# Altium PCB PCB1.PcbDoc
Units mil, origin at the board's own origin, x right, y up, seen from the top; angles counter-clockwise.
Board outline 2392.09 x 1644.16 mil, 2 copper layers (Top Layer, Bottom Layer); 52 components, 35 nets, 173 pads, 40 vias.
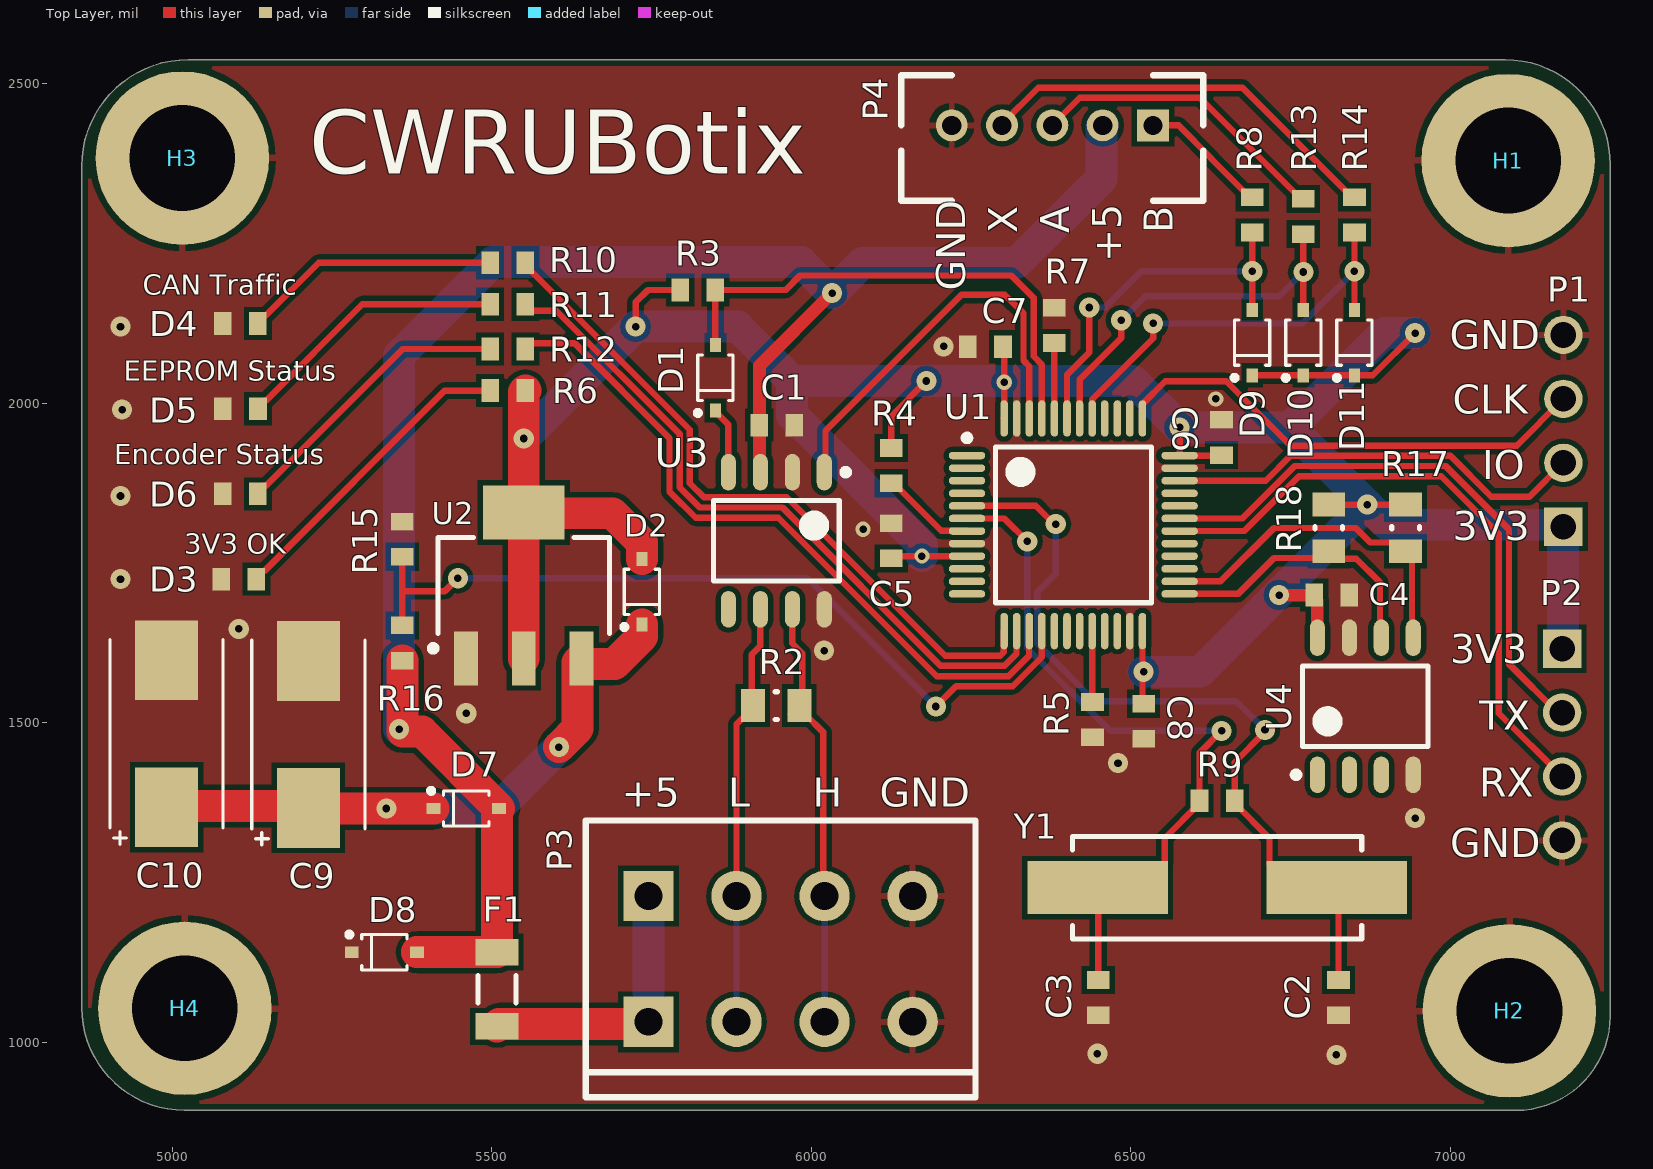
[diagram p0: Top Layer view]
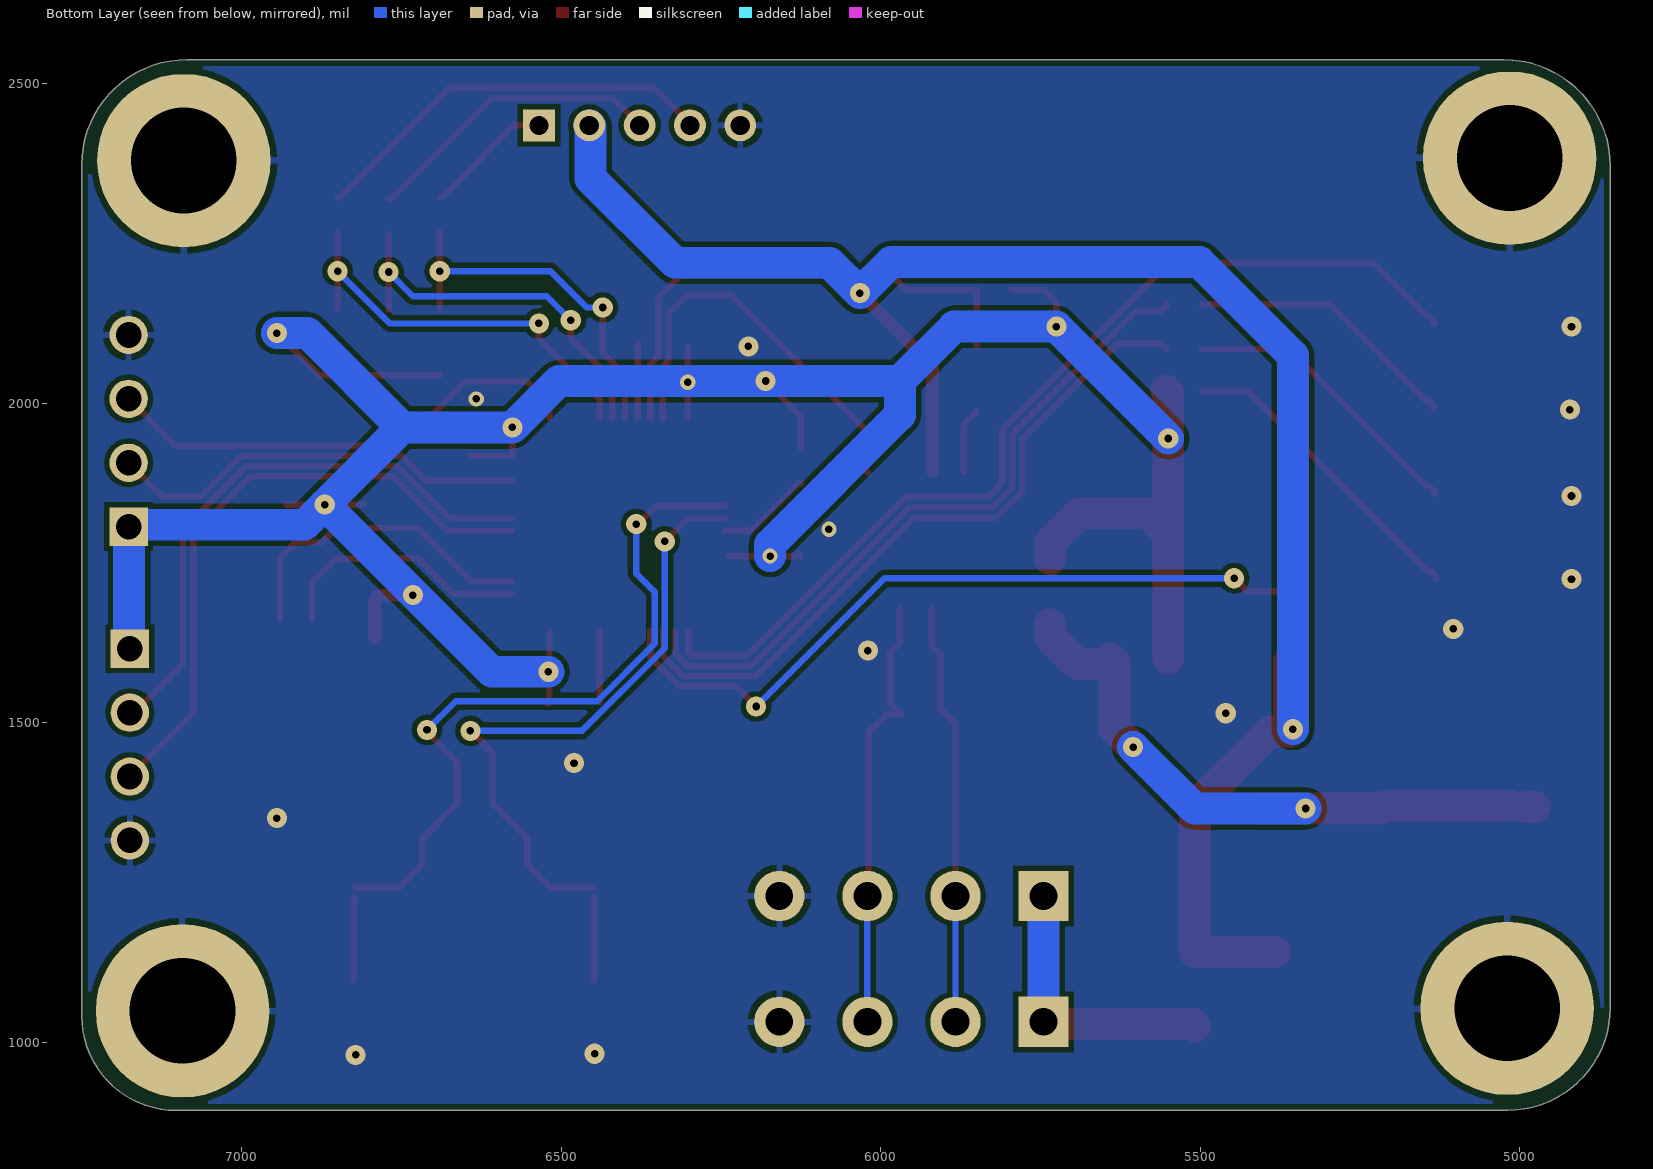
[diagram p1: Bottom Layer view, seen from below]

## Layer stack, top to bottom
Top Solder: solder mask 0.4, Solder Resist, Dk 3.5
Top Layer: signal copper 1.4
Dielectric 1: dielectric 12.6, FR-4, Dk 4.8
Bottom Layer: signal copper 1.4
Bottom Solder: solder mask 0.4, Solder Resist, Dk 3.5

## Board outline
4858.27,1054.49 ccw(c5019.06,1054.49) 5019.06,893.7 5019.06,893.6 7102.62,893.6 ccw(c7102.62,1041.34) 7250.36,1041.34 7250.36,2373.03 ccw(c7085.63,2373.03) 7085.63,2537.76 5025.04,2537.76 ccw(c5025.04,2370.99) 4858.27,2370.99

## Design rules (kind name [scope] priority, off if disabled: settings)
BoardOutlineClearance [All] p1: gap=10 ignorepadtopadclearanceinfootprint=FALSE except(0: Arc-SplitContinuation Track-SplitContinuation SMDPad-SplitContinuation THPad-SplitContinuation Via-SplitContinuation Fill-SplitContinuation Poly-SplitContinuation Region-SplitContinuation Text-SplitContinuation)
Clearance [All] p1: gap=7.87 ignorepadtopadclearanceinfootprint=FALSE except(0: Arc-Hole Track-Hole SMDPad-Hole THPad-Hole Via-Hole Fill-Hole Poly-Hole Region-Hole Text-Hole; 5.91: Arc-Arc Arc-Track Arc-SMDPad Arc-THPad Arc-Via Track-Track Track-SMDPad Track-THPad Track-Via SMDPad-SMDPad SMDPad-THPad SMDPad-Via THPad-THPad THPad-Via Via-Via; 10: Arc-Text Track-Text SMDPad-Text THPad-Text Via-Text Fill-Text Poly-Text Region-Text Text-Text)
PolygonConnect [All] p1: thpad.connectstyle=Relief thpad.reliefconductorwidth=10 thpad.reliefentries=4 thpad.polygonreliefangle="90 Angle" thpad.airgapwidth=10 smdpad.connectstyle=Direct smdpad.reliefconductorwidth=10 smdpad.reliefentries=4 smdpad.polygonreliefangle="90 Angle" smdpad.airgapwidth=10 via.connectstyle=Direct via.reliefconductorwidth=10 via.reliefentries=4 via.polygonreliefangle="90 Angle" via.airgapwidth=10
RoutingVias [All] p1: holewidth=28 width=50 viastyle="Through Hole" minholewidth=28 minwidth=50 maxholewidth=28 maxwidth=50
SolderMaskExpansion [All] p1: expansion=4
Width [All] p1: maxlimit=19685.04 minlimit=5.91 preferedwidth=10 minimp=50.000000 maximp=50.000000 favimp=50.000000
30 further rules are at their usual default settings.

## Components (designator, comment, footprint, x,y, rotation, side; value= is the part's Value field where it differs from the comment)
C1 "cap_single_np" chip_0603 5946,1966 r180 top
C2 "cap_single_np" chip_0603 6825,1070 r270 top
C3 "cap_single_np" chip_0603 6449,1070 r270 top
C4 "cap_single_np" chip_0603 6814.56,1700 r0 top
C5 "cap_single_np" chip_0603 6125,1785 r270 top
C6 "cap_single_np" chip_0603 6642,1946.56 r270 top
C7 "cap_single_np" chip_0603 6272.44,2088.44 r0 top
C8 "cap_single_np" chip_0603 6520,1502.44 r90 top
C9 "cap_single_p" chip_2917_AVX_TAJD 5213,1482 r90 top
C10 "cap_single_p" chip_2917_AVX_TAJD 4991,1483 r90 top
D1 "diode_2" sod323_0 5850,2040 r90 top
D2 "diode_2" sod323_0 5735,1705 r90 top
D3 "diode_4" chip_0603 5104,1725 r0 top
D4 "diode_4" chip_0603 5106.44,2125 r0 top
D5 "diode_4" chip_0603 5106.56,1991.67 r0 top
D6 "diode_4" chip_0603 5106.44,1858.33 r0 top
D7 "diode_2" sod323_0 5460,1366 r0 top
D8 "diode_5" sod323_0 5332,1141 r0 top
D9 "diode_2" sod323_0 6690,2095 r90 top
D10 "diode_2" sod323_0 6770,2095 r90 top
D11 "diode_2" sod323_0 6850,2095 r90 top
F1 "PTC_0" chip_1206 5508,1083 r90 top
H1 "mounting_hole_0" #8-32_SOCKET_HEAD 7090.55,2379.92 r0 top
H2 "mounting_hole_0" #8-32_SOCKET_HEAD 7092.52,1049.21 r0 top
H3 "mounting_hole_0" #8-32_SOCKET_HEAD 5015.75,2383.86 r0 top
H4 "mounting_hole_0" #8-32_SOCKET_HEAD 5019.69,1053.15 r0 top
P1 "conn-4x1_0" HDDR_4x1_0 7177,1807 r90 top
P2 "conn-4x1_0" HDDR_4x1_0 7175,1616 r270 top
P3 "conn-4x1_0" TERM_3.50MM_4x1_0 5745.21,1229 r0 top
P4 "conn-5x1_0" JST_PHR_5_0 6534.74,2435 r180 top
R2 "res_single" chip_0805 5945,1527 r0 top
R3 "res_single" chip_0603 5822.44,2177.44 r0 top
R4 "res_single" chip_0603 6125,1902.56 r90 top
R5 "res_single" chip_0603 6440,1505 r90 top
R6 "res_single" chip_0603 5525,2020 r180 top
R7 "res_single" chip_0603 6380,2122 r270 top
R8 "res_single" chip_0603 6690,2295 r90 top
R9 "res_single" chip_0603 6635,1378 r180 top
R10 "res_single" chip_0603 5525,2220 r0 top
R11 "res_single" chip_0603 5525,2155 r0 top
R12 "res_single" chip_0603 5525,2085 r0 top
R13 "res_single" chip_0603 6770,2292.44 r90 top
R14 "res_single" chip_0603 6850,2295 r90 top
R15 "res_single" chip_0603 5360,1787.44 r270 top
R16 "res_single" chip_0603 5360,1625 r270 top
R17 "res_single" chip_0805 6930,1805 r270 top
R18 "res_single" chip_0805 6810,1805 r270 top
U1 "STM32F103C8" LQFP48_0 6410,1810 r0 top
U2 "LM1117" sot-223-4 5550,1715 r90 top
U3 "SN65HVD1050" SO-8 5945.33,1785 r270 top
U4 "24AA01" SO-8 6867,1526 r90 top
Y1 "osc_xtal_2p_0" ABLS_AT49_OSC 6822,1242 r180 top

## Footprints (in the part's own frame and the unit in brackets; to place one, negate y for a bottom-side part, rotate by r counter-clockwise, add the part's x,y. Pads: shape width x height; smd on the part's side, far side on the other; paste and mask are expansions set on the pad)
#8-32_SOCKET_HEAD [mm] "Mounting hole for #8-32 socket head cap screw"
  round 6.9 hole 4.2: 0(0,0)
ABLS_AT49_OSC [mil] "ABLS Crystal Oscillator"
  rect 220x83 smd: 1(0,0) 2(374,0)
  silkscreen extent -39,-80 413,80
chip_0603 [mm]
  rect 0.7x0.9 smd: 1(-0.7,0) 2(0.7,0)
  body extent -0.85,-0.45 0.85,0.45, height 0.6
chip_0805 [mm]
  rect 0.95x1.3 smd: 1(-0.925,0) 2(0.925,0)
  silkscreen extent -0.05,-0.55 0.05,0.55, body extent -1.05,-0.65 1.05,0.65, height 0.6
chip_1206 [mm]
  rect 1.05x1.7 smd: 1(-1.475,0) 2(1.475,0)
  silkscreen extent -0.55,-0.75 0.55,0.75, body extent -1.65,-0.85 1.65,0.85, height 0.6
chip_2917_AVX_TAJD [mil] "2917 footprint for AVX TAJD"
  rect 125x98.43 smd: 1(-115,0) 2(115,0)
  silkscreen extent -173,-89 148,89, body extent -147,-88 147,89, height 124
HDDR_4x1_0 [mil]
  rect 60x60 hole 40: 1(0,0)
  round 60 hole 40: 2(100,0) 3(200,0) 4(300,0)
JST_PHR_5_0 [mil]
  rect 50x50 hole 30: 1(0,0)
  round 50 hole 30: 2(78.74,0) 3(157.48,0) 4(236.22,0) 5(314.96,0)
  silkscreen extent -79,-79 394,118
LQFP48_0 [mm] "LQFP48, 7.00x7.00mm, 0.50mm"
  oval 1.45x0.3 smd: 1(-4.225,2.75) 2(-4.225,2.25) 3(-4.225,1.75) 4(-4.225,1.25) 5(-4.225,0.75) 6(-4.225,0.25) 7(-4.225,-0.25) 8(-4.225,-0.75) 9(-4.225,-1.25) 10(-4.225,-1.75) 11(-4.225,-2.25) 12(-4.225,-2.75) 25(4.225,-2.75) 26(4.225,-2.25) 27(4.225,-1.75) 28(4.225,-1.25) 29(4.225,-0.75) 30(4.225,-0.25) 31(4.225,0.25) 32(4.225,0.75) 33(4.225,1.25) 34(4.225,1.75) 35(4.225,2.25) 36(4.225,2.75)
  oval 0.3x1.45 smd: 13(-2.75,-4.225) 14(-2.25,-4.225) 15(-1.75,-4.225) 16(-1.25,-4.225) 17(-0.75,-4.225) 18(-0.25,-4.225) 19(0.25,-4.225) 20(0.75,-4.225) 21(1.25,-4.225) 22(1.75,-4.225) 23(2.25,-4.225) 24(2.75,-4.225) 37(2.75,4.225) 38(2.25,4.225) 39(1.75,4.225) 40(1.25,4.225) 41(0.75,4.225) 42(0.25,4.225) 43(-0.25,4.225) 44(-0.75,4.225) 45(-1.25,4.225) 46(-1.75,4.225) 47(-2.25,4.225) 48(-2.75,4.225)
  silkscreen extent -4.35,-3.1 3.1,3.57, body extent -3.5,-3.5 3.5,3.5, height 1.6
SO-8 [mm] "SO-8 Package"
  oval 1.45x0.6 smd: 1(-2.725,1.905) 2(-2.725,0.635) 3(-2.725,-0.635) 4(-2.725,-1.905) 5(2.725,-1.905) 6(2.725,-0.635) 7(2.725,0.635) 8(2.725,1.905)
  silkscreen extent -2.85,-2.5 1.6,2.88, body extent -3.08,-2.5 3.08,2.5, height 2
sod323_0 [mm] "SOD-323, 1.25mm x 1.7mm"
  rect 0.55x0.45 smd: 1(-1.3,0) 2(1.3,0)
  silkscreen extent -1.5,-0.7 0.9,0.8, body extent -0.9,-0.67 0.9,0.67, height 1
sot-223-4 [mm]
  rect 2.15x0.95 smd: 1(-2.9,2.3) 2(-2.9,0) 3(-2.9,-2.3)
  rect 2.15x3.25 smd: 4(2.9,0)
  silkscreen extent -2.62,-3.4 1.9,3.72, body extent -1.9,-3.4 1.9,3.4, height 1.1
TERM_3.50MM_4x1_0 [mm]
  rect 2x2 hole 1.1: 1(0,-5) 1(0,0)
  round 2 hole 1.1: 2(3.5,-5) 2(3.5,0) 3(7,-5) 3(7,0) 4(10.5,-5) 4(10.5,0)
  silkscreen extent -2.5,-8 13,3, body extent -2.5,-8 13,3, height 8.98

## Part data
C1 C4: library part CAP-00477, "CAP, 0.1uF, ±10%, 100V, X7R, 0603", Capacitance=0.1uF, Manufacturer=Murata, Manufacturer PN=GRM188R72A104KA35D, Tolerance=±10%, Voltage Rating=100V, Part Number=CAP-00477, Type=X7R
C2 C3: library part CAP-00409, "CAP, 18pF, ±2%, 50V, C0G, 0603", Capacitance=18pF, Manufacturer=Murata, Manufacturer PN=GRM1885C1H180GA01D, Tolerance=±2%, Voltage Rating=50V, Part Number=CAP-00409, Type=C0G
C5 C6 C7 C8: library part CAP-00530, "CAP, 0.1uF, ±10%, 100V, X7R, 0603", Capacitance=0.1uF, Manufacturer=Murata, Manufacturer PN=GRM188R72A104KA35J, Tolerance=±10%, Voltage Rating=100V, Part Number=CAP-00530, Type=X7R
C9 C10: library part CAP-00550, "CAP, 100uF, ±10%, 16V, Tantalum, 2917", Capacitance=100uF, Manufacturer=AVX, Manufacturer PN=TAJD107K016RNJ, Tolerance=±10%, Voltage Rating=16V, Cost=$0.94, Part Number=CAP-00550, Type=Tantalum
D1 D2 D7 D9 D10 D11: library part DIO-00000, "Dio Shtky, 500mA, 0.62V, 30V, SOD-323", Current Rating=500mA, Forward Voltage=620mV, Manufacturer="ON Semi", Manufacturer PN=NSR0530HT1G, Reverse Breakdown Voltage=30V, Part Number=DIO-00000, Type=Schottky
D3: library part DIO-00050, "LED, Green, 0603, Low current, HELI2 Series", Current Rating=30mA, Forward Voltage=2.65V, Manufacturer=Kingbright, Manufacturer PN=APT1608LZGCK, Power Rating=120mW, Reverse Breakdown Voltage=5V, Cost=0.58, Part Number=DIO-00050, Type=LED
D4 D5 D6: library part DIO-00049, "LED, Blue, 0603, Low current, HELI2 Series", Current Rating=30mA, Forward Voltage=2.65V, Manufacturer=Kingbright, Manufacturer PN=APT1608LVBC/D, Power Rating=120mW, Reverse Breakdown Voltage=5V, Cost=0.58, Part Number=DIO-00049, Type=LED
D8: library part DIO-00037, "TVS, 5V, 500W", Manufacturer=ST, Manufacturer PN=ESDA8V2-1J, Power Rating=500W, Reverse Breakdown Voltage=5V, Part Number=DIO-00037, Type=TVS
F1: library part MISC-00008, "PTC Resettable fuse, 6V, 500mA, 1206", Manufacturer=Eaton, Manufacturer PN=PTS12066V050, Cost=0.3, Part Number=MISC-00008
H1 H2 H3 H4: library part MISC-00027, "#8-32 Mounting Hole for Socket Head Cap Screw", Part Number=MISC-00027
P1 P2: library part CONN-00029, "Header 4x1, 0.1\"", Levels=1, Part Number=CONN-00029, Positions per level=4, Type=Header
P3: library part CONN-00024, "Term Blk, 4 Pos, 16A, 3.5mm Pitch", Current=16, Manufacturer="Phoenix Contact", Manufacturer PN=1861959, Cost=1.67, Levels=1, Part Number=CONN-00024, Positions per level=4, Type="Terminal Block"
P4: library part CONN-00016, "JST PHR 5x1", Manufacturer=JST, Levels=1, Part Number=CONN-00016, Positions per level=5, Type=Header
R2: library part RES-00183, "RES SMD 120 OHM 1% 1/8W 0805", Manufacturer="Rohm Semiconductor", Manufacturer PN=KTR10EZPF1200, Power Rating=0.125W, Resistance=120, Tolerance=1%, Part Number=RES-00183
R3: library part RES-00470, "RES SMD 4.7K OHM 1% 1/4W 0603", Manufacturer=Panasonic, Manufacturer PN=ERJ-PA3F4701V, Power Rating=0.25W, Resistance=4.7k, Tolerance=1%, Part Number=RES-00470
R4 R5 R7: library part RES-00301, "RES SMD 100K OHM 1% 1/4W 0603", Manufacturer=Panasonic, Manufacturer PN=ERJ-PA3F1003V, Power Rating=0.25W, Resistance=100k, Tolerance=1%, Part Number=RES-00301
R6: library part RES-00159, "RES SMD 56 OHM 1% 1/4W 0603", Manufacturer=Panasonic, Manufacturer PN=ERJ-PA3F56R0V, Power Rating=0.25W, Resistance=56, Tolerance=1%, Part Number=RES-00159
R8 R13 R14: library part RES-00306, "RES SMD 10K OHM 1% 1/4W 0603", Manufacturer=Panasonic, Manufacturer PN=ERJ-PA3F1002V, Power Rating=0.25W, Resistance=10k, Tolerance=1%, Cost=0.144, Part Number=RES-00306
R9: library part RES-00362, "RES SMD 1M OHM 1% 1/4W 0603", Manufacturer=Panasonic, Manufacturer PN=ERJ-PA3F1004V, Power Rating=0.25W, Resistance=1M, Tolerance=1%, Part Number=RES-00362
R10 R11 R12: library part RES-00188, "RES SMD 150 OHM 1% 1/4W 0603", Manufacturer=Panasonic, Manufacturer PN=ERJ-PA3F1500V, Power Rating=0.25W, Resistance=150, Tolerance=1%, Part Number=RES-00188
R15: library part RES-00365, "RES SMD 2.2K OHM 1% 1/4W 0603", Manufacturer=Panasonic, Manufacturer PN=ERJ-PA3F2201V, Power Rating=0.25W, Resistance=2.2k, Tolerance=1%, Part Number=RES-00365
R16: library part RES-00360, "RES SMD 1K OHM 1% 1/4W 0603", Manufacturer=Panasonic, Manufacturer PN=ERJ-PA3F1001V, Power Rating=0.25W, Resistance=1k, Tolerance=1%, Part Number=RES-00360
R17 R18: library part RES-00263, "RES SMD 1.07K OHM 1% 1/8W 0805", Manufacturer="Rohm Semiconductor", Manufacturer PN=KTR10EZPF1071, Power Rating=0.125W, Resistance=1.07k, Tolerance=1%, Part Number=RES-00263
U1: library part UCTRL-00008, "STM32 M3, LQFP-48", Manufacturer=ST, Manufacturer PN=STM32F103C8, Part Number=UCTRL-00008
U2: library part PWREG-00018, "REG, Linear, Fixed 3V3, 800mA, SOT-223", Manufacturer=TI, Manufacturer PN=LM1117MPX-3.3/NOPB, Max Current=800mA, Voltage Range In="4.5 - 15V", Voltage Range Out=3.3V, Cost=1.14, Fixed/Adj=Fixed, Part Number=PWREG-00018, Reg Type=Linear
U3: library part IFACE-00010, "CANbus Transceiver, Single channel, EMC Optimized, SN65HVD1050", Manufacturer=TI, Manufacturer PN=SN65HVD1050DR, Cost=1.36, Part Number=IFACE-00010
U4: library part LOGIC-00028, "EEPROM, 1K-bit, I2C, 400kHz, 24AA01, 8-SOIC", Manufacturer=Microchip, Manufacturer PN=24AA01-I/SN, Cost=$0.20, Part Number=LOGIC-00028
Y1: library part OSC-00002, "XTAL, 8MHz, 18pF, 20ppm", Frequency=8.000M, Load Capacitance=18pF, Manufacturer=Abracon, Manufacturer PN=ABLS-8.000MHZ-B2-T, Tolerance=20ppm, ESR=80, Part Number=OSC-00002, Stability=50ppm

## Via types
v1: diameter 31.5, hole 11.81, Top Layer to Bottom Layer, 36 vias
v2: diameter 23.62, hole 11.81, Top Layer to Bottom Layer, tented both sides, 2 vias
v3: diameter 23.62, hole 11.81, Top Layer to Bottom Layer, 2 vias

## Nets (pads, with @x,y where several pads share a name; then routed paths per layer and width w, separated by ;. In a path a pad name is that pad's centre, name@x,y a point inside that pad or via, vN(x,y) a via of type N, cw(c..) or ccw(c..) an arc to the next point about the centre after c; other vN are vias at no path point)
+3V3: C4.1 C5.2 C6.2 C7.2 C8.2 D2.2 D9.1 D10.1 D11.1 P1.1 P2.1 R3.1 R4.2 R6.1 R17.1 R18.1 U1.9 U1.24 U1.36 U1.48 U2.2 U2.4 U4.8 | length 4993.3
  Top Layer w10: v1(5725,2120) 5725,2158 5744.44,2177.44 R3.1 ; C5.2@6125,1760 6128.66,1763.66 6131.32,1761 v3(6173,1761) U1.9@6238.13,1761 ; R4.2 6125,1980 v1(6180,2035) ; C7.2 6302,2086.44 v3(6302,2033) 6302,1978.61 6301,1977.61 6302,1976.61 U1.48 ; U1.24 6518.27,1531.73 C8.2 ; v1(6576.34,1962.3) U1.36 6641.27,1918.27 C6.2 ; D9.1 D10.1 D11.1 6878.82,2043.82 v1(6945,2110) ; R18.1 v1(6870,1841.42) R17.1
  Top Layer w19.68: v1(6732,1700) C4.1 6787,1696.06 6792,1691.06 U4.8
  Top Layer w50: U2.2 U2.4 ; R6.1 5550,2017.44 v1(5550,1945) U2.4 ; U2.4@5567.32,1811.85 U2.4 ; D2.2 5735,1782 5688.98,1828.02 5551.15,1828.02 U2.4
  Bottom Layer w50: v1(5550,1945) v1(5725,2120) 5885,2120 5970,2035 ; v3(6173,1761) 6173,1779 5970,1982 5970,2035 ; v1(6520,1580) 6608.58,1580 v1(6870,1841.42) ; v1(6945,2110) 6896.81,2110 6749.11,1962.3 ; P2.1 7176,1617 7176,1806 P1.1 7174,1810 6901.42,1810 v1(6870,1841.42) ; 5970,2035 v1(6180,2035) 6503.64,2035 v1(6576.34,1962.3) 6749.11,1962.3 ; 6749.11,1962.3 v1(6870,1841.42)
+5: F1.1 P3.1 | length 437.9
  Top Layer w50: F1.1@5508.39,1024.54 F1.1 5511.61,1028.54 5740.82,1028.54 5744.82,1032.54 P3.1@5745.21,1032.15
  Bottom Layer w50: P3.1@5745.21,1032.15 P3.1@5745.21,1229
+5_SAFE: C1.2 D7.2 D8.2 F1.2 P4.2 R16.2 U3.3 | length 2913.9
  Top Layer w10: U3.3@5918.89,1893.73 U3.3
  Top Layer w20: U3.3@5918.89,1893.73 5918.89,2058.89 v1(6032.5,2172.5)
  Top Layer w50: R16.2 5360,1486.18 5391,1486.18 D7.2 5508,1362.82 F1.2 5383.25,1141.07 D8.2
  Bottom Layer w50: v1(5355,1490) 5355,2075 5501,2221 5984,2221 v1(6032.5,2172.5) 6080,2220 6322,2220 6454,2352 6454,2433 P4.2
CAN_H: P3.3 R2.2 U3.7 | length 711.6
  Top Layer w10: U3.7 5970.33,1624.67 5986,1609 5986,1531.58 R2.2 5967.72,1513.3 5990.7,1513.3 6019,1485 6019,1230.8 6020.8,1229 6012.8,1229 P3.3@6018.8,1235
  Bottom Layer w10: P3.3@6020.8,1032.15 P3.3@6020.8,1229
CAN_L: P3.2 R2.1 U3.6 | length 661
  Top Layer w10: P3.2@5883,1229 5883,1497.69 5907,1521.69 5907,1607 5920.33,1620.33 U3.6
  Bottom Layer w10: P3.2@5883,1032.15 P3.2@5883,1229
CAN_RX: D1.2 R3.2 U1.45 | length 802
  Top Layer w10: D1.2 R3.2 5959.79,2177.44 5982.34,2200 6312.97,2200 6348,2164.97 6348,2073.52 6360.79,2060.73 U1.45
CAN_TX: U1.46 U3.1 | length 644.1
  Top Layer w10: U3.1 6022.28,1894.23 6022.28,1957.28 6235,2170 6303,2170 6332,2141 6332,2067.03 6341.1,2057.93 U1.46
ENC_A: D10.2 R13.1 U1.42 | length 615.6
  Top Layer w10: U1.42 6419.84,2037.15 6485,2102.31 v1(6485,2130) ; D10.2 v1(6770,2205.53) R13.1
  Bottom Layer w10: v1(6485,2130) 6522.77,2167.77 6732.23,2167.77 v1(6770,2205.53)
ENC_B: D9.2 R8.1 U1.43 | length 587.9
  Top Layer w10: U1.43 6400.16,2044.81 6435,2079.65 v1(6435,2150) ; D9.2 v1(6690,2206.81) R8.1
  Bottom Layer w10: v1(6435,2150) 6460,2150 6516.81,2206.81 v1(6690,2206.81)
ENC_X: D11.2 R14.1 U1.41 | length 658.4
  Top Layer w10: U1.41 6439.53,2006.46 6535,2101.93 v1(6535,2125) ; D11.2 v1(6850,2206.81) R14.1
  Bottom Layer w10: v1(6535,2125) 6768.19,2125 v1(6850,2206.81)
GND: C1.1 C2.2 C3.2 C4.2 C5.1 C6.1 C7.1 C8.1 C9.2 C10.2 D3.1 D4.1 D5.1 D6.1 D8.1 H1.0 H2.0 H3.0 H4.0 P1.4 P2.4 P3.4 P4.5 R5.1 R7.1 R15.1 U1.8 U1.23 U1.35 U1.47 U2.1 U3.2 U3.8 U4.4 U4.7
  other v1: 6821.83,980.28 6447.82,982.24 6945,1351 6480,1437 5460,1515 6020,1613 5104,1647 4919,1725 4919,1855 4921.6,1990.16 6207,2089 4919,2120
  other v2: 6081,1803 6633,2007
MEM_SCL: R18.2 U1.25 U4.6 | length 414.2
  Top Layer w10: U1.25 6667.86,1701.73 6724.13,1758 6799.42,1758 R18.2@6806.56,1765.14 ; R18.2@6805.31,1757 6853,1757 6890,1720 6890,1662.28
MEM_SDA: R17.2 U1.26 U4.5 | length 513.8
  Top Layer w10: U1.26 6640.44,1721.42 6724.02,1805 6852,1805 6874.72,1782.28 6916.3,1782.28 R17.2 6940,1758.58 6940,1662.28
NetC2_1: C2.1 R9.1 U1.5 Y1.1 | length 1265.4
  Top Layer w10: U1.5 6351.47,1839.53 6380,1811 v1(6382.5,1811) ; v1(6710,1489) 6710,1486 6662.56,1438.56 R9.1 6662.56,1374.06 6717,1319.62 6717,1278.5 6753.5,1242 Y1.1 ; Y1.1@6824,1228 6825,1227 C2.1
  Bottom Layer w10: v1(6382.5,1811) 6382.5,1733.59 6353.91,1705 6353.91,1623.59 6443.59,1533.91 6665.09,1533.91 v1(6710,1489)
NetC3_1: C3.1 R9.2 U1.6 Y1.2 | length 1134.2
  Top Layer w10: U1.6 6302.16,1819.84 v1(6338,1784) ; Y1.2 6516.5,1242 6553,1278.5 6553,1319.62 6607.44,1374.06 R9.2 6607.44,1452.94 v1(6642,1487.5) v1@6642,1491 ; C3.1 6449,1227 Y1.2@6450,1228
  Bottom Layer w10: v1(6338,1784) 6338,1617 6467.5,1487.5 v1(6642,1487.5)
NetC9_1: C9.1 C10.1 D2.1 D7.1 U2.3 | length 1012.1
  Top Layer w50: C10.1@4976,1368 C10.1 ; C10.1@5012.84,1369.72 5213,1369.72 5216.72,1366 v1(5335,1366) D7.1 ; v1(5605,1462) 5634.25,1491.25 5634.25,1594.53 U2.3 5640.55,1598.3 5646.85,1592 5692,1592 5735,1635 D2.1
  Bottom Layer w50: v1(5335,1366) 5509,1366 v1(5605,1462)
NetD1_1: D1.1 U3.4 | length 105
  Top Layer w10: D1.1 5850,1986.85 5870.33,1966.52 U3.4
NetD3_2: D3.2 R6.2 | length 490.4
  Top Layer w10: D3.2 5131.56,1728.94 5140.34,1737.72 5144.28,1737.72 5426.56,2020 R6.2
NetD4_2: D4.2 R10.1 | length 405.1
  Top Layer w10: D4.2 5134,2128.94 5142.78,2137.72 5146.72,2137.72 5229,2220 R10.1
NetD5_2: D5.2 R11.1 | length 433.3
  Top Layer w10: D5.2 5134.12,1995.6 5142.9,2004.38 5146.83,2004.38 5297.45,2155 R11.1
NetD6_2: D6.2 R12.1 | length 459.6
  Top Layer w10: D6.2 5134,1862.27 5142.78,1871.05 5146.72,1871.05 5360.67,2085 R12.1
NetP4_1: P4.1 R8.2 | length 202.5
  Top Layer w10: P4.1 6574.74,2435 6626.01,2383.73 6626.01,2382.61 6686.06,2322.56 R8.2
NetP4_3: P4.3 R13.2 | length 476
  Top Layer w10: P4.3 6420.26,2478 6608.06,2478 6766.06,2320 R13.2
NetP4_4: P4.4 R14.2 | length 648.3
  Top Layer w10: P4.4 6298.52,2437.52 6354.91,2493.91 6674.72,2493.91 6846.06,2322.56 R14.2
NetR4_1: R4.1 U1.7 | length 149.7
  Top Layer w10: R4.1 6128.94,1875 6203.43,1800.5 6243.32,1800.5 U1.7
NetR5_2: R5.2 U1.20 | length 111.3
  Top Layer w10: U1.20 6439.53,1533.03 R5.2
NetR7_2: R7.2 U1.44 | length 118.1
  Top Layer w10: U1.44 R7.2@6380.47,2094.44
NetR10_2: R10.2 U1.13 | length 1090.2
  Top Layer w10: R10.2 5552.56,2216.06 5810,1958.62 5810,1875 5832.17,1852.83 5961.56,1852.83 6209.39,1605 6295.53,1605 6301.39,1610.86 6301.39,1643.32 U1.13
NetR11_2: R11.2 U1.14 | length 1096.2
  Top Layer w10: R11.2 5552.56,2153.78 5561.34,2145 5601.13,2145 5794.09,1952.04 5794.09,1868.41 5825.58,1836.93 5954.97,1836.93 6202.8,1589.09 6302.12,1589.09 6321.07,1608.05 6321.07,1643.32 U1.14
NetR12_2: R12.2 U1.15 | length 1109.1
  Top Layer w10: R12.2 5552.56,2085.54 5561.34,2094.32 5629.32,2094.32 5778.19,1945.45 5778.19,1861.82 5818.99,1821.02 5948.38,1821.02 6196.21,1573.19 6308.7,1573.19 6340.76,1605.24 6340.76,1643.32 U1.15
POWER_SENSE: R15.2 R16.1 U1.16 | length 1272.5
  Top Layer w10: R16.1 5360,1706.22 ; R15.2 5360,1706.22 ; v1(5446.85,1726.38) 5426.69,1706.22 5360,1706.22 ; v1(6194.88,1525.59) 6226.57,1557.28 6315.29,1557.28 6360.44,1602.43 6360.44,1643.32 U1.16
  Bottom Layer w10: v1(5446.85,1726.38) 5994.09,1726.38 v1(6194.88,1525.59)
SWDCLK: P1.3 U1.37 | length 768.3
  Top Layer w10: U1.37 6518.27,1998.98 6553.98,2034.69 6649.31,2034.69 6750.28,1933.72 7103.72,1933.72 P1.3
SWDIO: P1.2 U1.34 | length 665.2
  Top Layer w10: U1.34 6711.06,1878.9 6749.98,1917.81 7000.19,1917.81 7064,1854 7124,1854 P1.2
USART1_RX: P2.3 U1.30 | length 993.5
  Top Layer w10: U1.30 6677.31,1800.16 6763.15,1886 6986,1886 7076,1796 7076,1515 P2.3
USART1_TX: P2.2 U1.31 | length 915.9
  Top Layer w10: U1.31 6674.5,1819.84 6756.57,1901.91 6992.59,1901.91 7091.91,1802.59 7091.91,1592 7167.91,1516 P2.2
pads on no net: U1.1 U1.2 U1.3 U1.4 U1.10 U1.11 U1.12 U1.17 U1.18 U1.19 U1.21 U1.22 U1.27 U1.28 U1.29 U1.32 U1.33 U1.38 U1.39 U1.40 U3.5 U4.1 U4.2 U4.3

## Polygon pours and split planes (outlines as drawn)
GND on Bottom Layer "Top Layer-No Net" (solid, pour order 13): 4858.27,1054.49 ccw(c5019.06,1054.49) 5019.06,893.7 5019.06,893.6 7102.62,893.6 ccw(c7102.62,1041.34) 7250.36,1041.34 7250.36,2373.03 ccw(c7085.63,2373.03) 7085.63,2537.76 5025.04,2537.76 ccw(c5025.04,2370.99) 4858.27,2370.99
GND on Top Layer "Top Layer-GND" (solid, pour order 12): 4858.27,1054.49 ccw(c5019.06,1054.49) 5019.06,893.7 5019.06,893.6 7102.62,893.6 ccw(c7102.62,1041.34) 7250.36,1041.34 7250.36,2373.03 ccw(c7085.63,2373.03) 7085.63,2537.76 5025.04,2537.76 ccw(c5025.04,2370.99) 4858.27,2370.99

## Silkscreen, mask and mechanical layers (free items; w line width, h text height)
Top Overlay:
  text "CWRUBotix" at 5214,2359 h100
  text "X" at 6322.25,2266 h45 r90
  text "A" at 6403.5,2266 h45 r90
  text "B" at 6566,2266 h45 r90
  text "+5" at 6484.75,2221.01 h45 r90
  text "GND" at 6241,2176.03 h45 r90
  text "CAN Traffic" at 4954,2170 h31.5
  text "GND" at 6999,2085 h45
  text "EEPROM Status" at 4924,2035 h31.5
  text "CLK" at 7004,1984 h45
  text "Encoder Status" at 4909,1905 h31.5
  text "IO" at 7050,1881 h45
  text "3V3" at 7004,1786 h45
  text "3V3 OK" at 5019,1765 h31.5
  text "3V3" at 7000,1593 h45
  text "TX" at 7044.98,1489 h45
  text "RX" at 7044.98,1384 h45
  text "+5" at 5703,1369 h45
  text "L" at 5870,1369 h45
  text "H" at 6002,1369 h45
  text "GND" at 6107,1369 h45
  text "GND" at 7000,1290 h45
Mechanical 1:
  lines w3.94: 5019.06,893.6 7102.62,893.6 ccw(c7102.62,1041.34) 7250.36,1041.34 7250.36,2373.03 ccw(c7085.63,2373.03) 7085.63,2537.76 5025.04,2537.76 ccw(c5025.04,2370.99) 4858.27,2370.99 4858.27,1054.49 ccw(c5019.06,1054.49) 5019.06,893.7